# Altium PCB controller_V1.1.PcbDoc
Units mm, origin at the board's own origin, x right, y up, seen from the top; angles counter-clockwise.
Board outline 150.51 x 150.51 mm, 4 copper layers (Top Layer, GND, VCC, Bottom Layer); 133 components, 126 nets, 409 pads, 1 vias.
Unrouted connection lines stored in the file: 232.
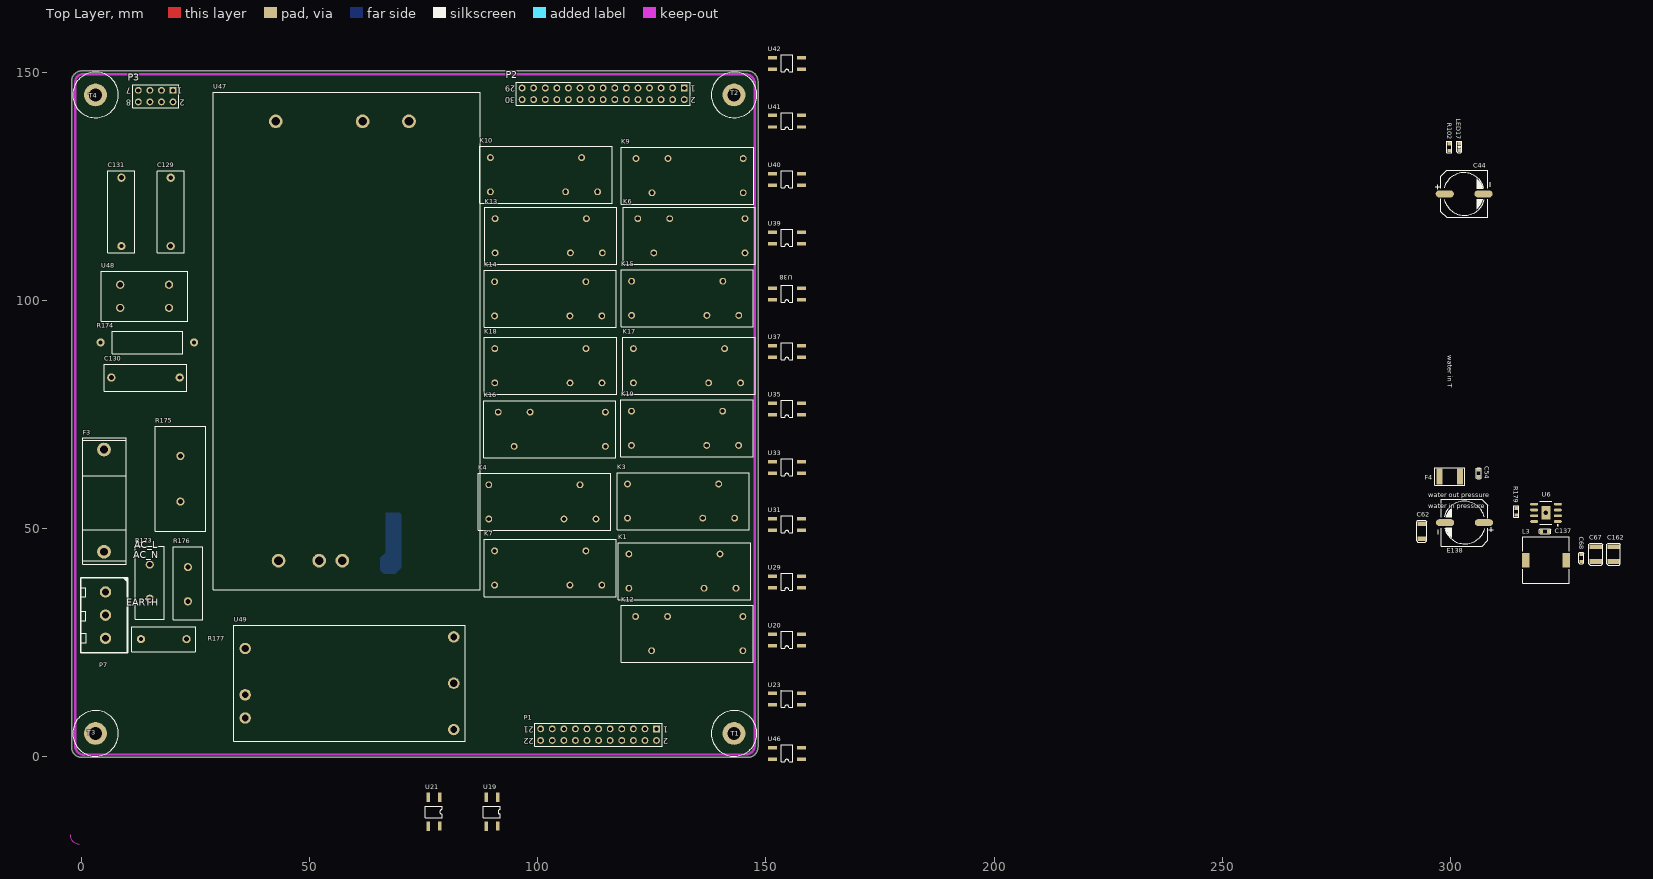
[diagram p0: Top Layer view]
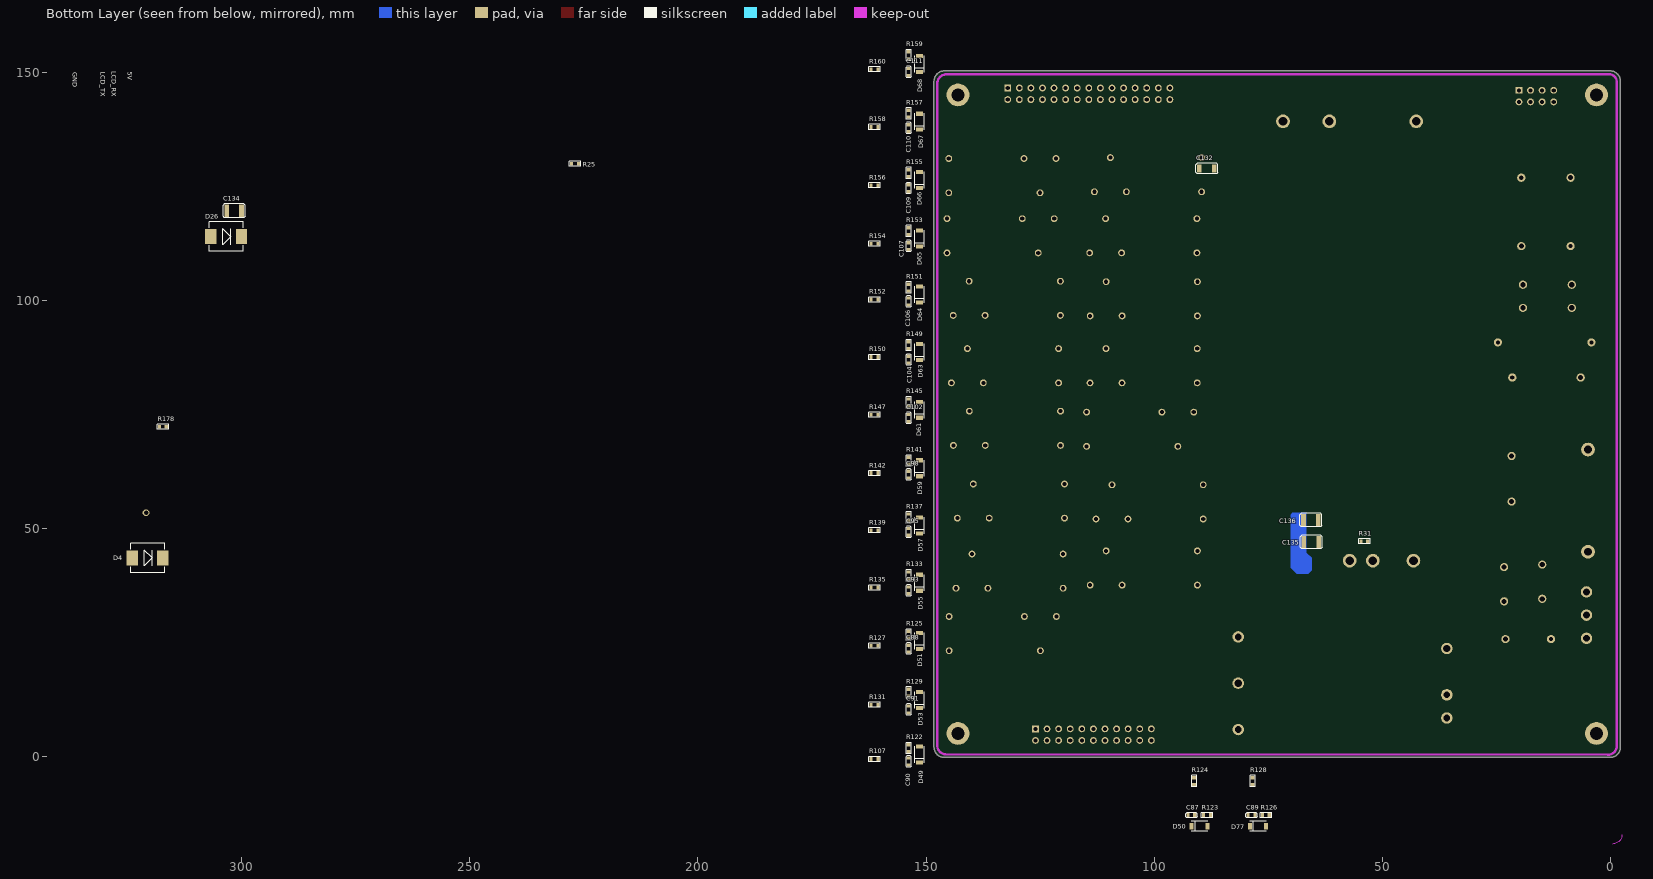
[diagram p1: Bottom Layer view, seen from below]

## Layer stack, top to bottom
Top Solder: solder mask 0.0102, Solder Resist, Dk 3.5
Top Layer: signal copper 0.0356
Dielectric1: core 0.32, FR-4, Dk 4.8
GND: signal copper 0.0356
Dielectric2: prepreg 0.32, FR-4, Dk 4.8
VCC: signal copper 0.0356
Dielectric3: core 0.32, FR-4, Dk 4.8
Bottom Layer: signal copper 0.0356
Bottom Solder: solder mask 0.0102, Solder Resist, Dk 3.5

## Board outline
0,-0.254 cw(c0,2) -2.254,2 -2.254,147.997 -2.254,148 cw(c0,148) 0,150.254 146,150.254 cw(c146,148) 148.254,148 148.254,2 cw(c146,2) 146,-0.254

## Design rules (kind name [scope] priority, off if disabled: settings)
Clearance [InPolygon] p1: gap=0.381 ignorepadtopadclearanceinfootprint=FALSE except(0: Arc-Hole Track-Hole SMDPad-Hole THPad-Hole Via-Hole Fill-Hole Poly-Hole Region-Hole Text-Hole)
Clearance Clearance_1 [All] p2: gap=0.127 ignorepadtopadclearanceinfootprint=FALSE except(0: Arc-Hole Track-Hole SMDPad-Hole THPad-Hole Via-Hole Fill-Hole Poly-Hole Region-Hole Text-Hole)
HoleToHoleClearance [All] p1: gap=0.127 allowstackedmicrovias=TRUE
MinimumSolderMaskSliver [All] p1: minsoldermaskwidth=0.127
PolygonConnect PolygonConnect_1 [IsVia] p1: connectstyle=Direct reliefconductorwidth=0.254 reliefentries=4 polygonreliefangle="90 Angle" airgapwidth=0.254
PolygonConnect [All] p2: connectstyle=Relief reliefconductorwidth=0.508 reliefentries=4 polygonreliefangle="90 Angle" airgapwidth=0.254
RoutingVias [All] p1: holewidth=0.254 width=0.508 viastyle="Through Hole" minholewidth=0.254 minwidth=0.508 maxholewidth=2.54 maxwidth=5.08
SilkToSilkClearance [All] p1: silktosilkclearance=0.127
SilkToSolderMaskClearance SilkscreenOverComponentPads [IsPad] p1: minsilkscreentomaskgap=0 clearancetoexposedcopper=TRUE
SolderMaskExpansion [All] p1: expansion=0.102 istentingtop=FALSE
Width [All] p1: maxlimit=5.08 minlimit=0.254 preferedwidth=0.254
26 further rules are at their usual default settings.

## Classes and differential pairs
net class N000-1_[0..19]: N000-1_0 N000-1_1 N000-1_2 N000-1_3 N000-1_4 N000-1_5 N000-1_6 N000-1_7 N000-1_8 N000-1_9 N000-1_10 N000-1_11 N000-1_12 N000-1_13 N000-1_14 N000-1_15 N000-1_16 N000-1_17 N000-1_18 N000-1_19
net class DO_O[0..19]: DO_O0 DO_O1 DO_O2 DO_O3 DO_O4 DO_O5 DO_O6 DO_O7 DO_O8 DO_O9 DO_O10 DO_O11 DO_O12 DO_O13 DO_O14 DO_O15 DO_O16 DO_O17 DO_O18 DO_O19
net class DO[0..19]: DO0 DO1 DO2 DO3 DO4 DO5 DO6 DO7 DO8 DO9 DO10 DO11 DO12 DO13 DO14 DO15 DO16 DO17 DO18 DO19
net class DI[0..11]: DI0 DI1 DI2 DI3 DI4 DI5 DI6 DI7 DI8 DI9 DI10 DI11
component class relay: K1 K3 K4 K6 K7 K9 K10 K12 K13 K14 K15 K16 K17 K18 K19 P2
component class power: C44 C54 C62 C67 C68 C129 C130 C131 C132 C134 C135 C136 C137 C162 D4 D26 E138 F3 F4 L3 LED17 P7 R25 R31 R102 R173 R174 R175 R176 R177 R178 R179 T1 T2 T3 T4 U6 U47 U48 U49
component class do: C87 C88 C89 C90 C91 C93 C95 C98 C102 C104 C106 C107 C109 C110 C111 D49 D50 D51 D53 D55 D57 D59 D61 D63 D64 D65 D66 D67 D68 D77 F1 P1 P3 R107 R122 R123 R124 R125 R126 R127 R128 R129 R131 R133 R135 R137 R139 R141 R142 R145 R147 R149 R150 R151 R152 R153 R154 R155 R156 R157 R158 R159 R160 U19 U20 U21 U23 U29 U31 U33 U35 U37 U38 U39 U40 U41 U42 U46

## Components (designator, comment, footprint, x,y, rotation, side; value= is the part's Value field where it differs from the comment)
C44 "220uF/50V" Φ10×10 303.077,123.292 r90 top
C54 "1uF" 0603C 306.252,62.789 r270 top
C62 "1nF/2kV" 1206C 293.755,50.952 r270 top
C67 "22uF/10V" 1210C 331.931,42.697 r90 top
C68 "0.1uF" 0603C 328.756,42.697 r90 top
C87 "0.1uF" 0603C 92.563,-12.929 r180 bottom
C88 "0.1uF" 0603C 153.829,22.838 r90 bottom
C89 "0.1uF" 0603C 79.403,-12.929 r180 bottom
C90 "0.1uF" 0603C 153.829,-1.918 r90 bottom
C91 "0.1uF" 0603C 153.829,9.504 r90 bottom
C93 "0.1uF" 0603C 153.829,35.612 r90 bottom
C95 "0.1uF" 0603C 153.829,48.441 r90 bottom
C98 "0.1uF" 0603C 153.829,60.984 r90 bottom
C102 "0.1uF" 0603C 153.829,73.41 r90 bottom
C104 "0.1uF" 0603C 153.829,86.186 r90 bottom
C106 "0.1uF" 0603C 153.829,98.937 r90 bottom
C107 "0.1uF" 0603C 153.829,111.078 r90 bottom
C109 "0.1uF" 0603C 153.829,123.778 r90 bottom
C110 "0.1uF" 0603C 153.829,136.96 r90 bottom
C111 "0.1uF" 0603C 153.829,149.254 r90 bottom
C129 "2.2nF/400VAC" 15x18 19.488,126.836 r270 top value=22nF
C130 "0.15μF/300VAC" 15x18 21.458,83.033 r180 top value=22nF
C131 "2.2nF/400VAC" 15x18 8.668,111.836 r90 top value=22nF
C132 "1nF/2KV" 1206C 90.05,128.854 r180 bottom value=22nF
C134 "1uF/50V" 1210C 303.331,119.609 r180 bottom value=22nF
C135 "4.7uF/50V" 1210C 63.91,46.965 r0 bottom value=22nF
C136 "10uF/50V" 1210C 63.988,51.791 r0 bottom value=22nF
C137 "0.01uF" 0603C 320.044,49.276 r0 top
C162 "22uF/10V" 1210C 335.843,42.697 r90 top
D4 "SS54" SMC 324.057,43.459 r180 bottom
D26 "SMCJ30CA" SMC 306.832,113.919 r180 bottom
D49 "LL4148" DO-213AB/LL34/MiniMELF 151.416,0.368 r90 bottom
D50 "LL4148" DO-213AB/LL34/MiniMELF 90.023,-15.342 r180 bottom
D51 "LL4148" DO-213AB/LL34/MiniMELF 151.416,25.251 r90 bottom
D53 "LL4148" DO-213AB/LL34/MiniMELF 151.416,12.298 r90 bottom
D55 "LL4148" DO-213AB/LL34/MiniMELF 151.416,38.025 r90 bottom
D57 "LL4148" DO-213AB/LL34/MiniMELF 151.416,50.6 r90 bottom
D59 "LL4148" DO-213AB/LL34/MiniMELF 151.416,63.143 r90 bottom
D61 "LL4148" DO-213AB/LL34/MiniMELF 151.416,75.95 r90 bottom
D63 "LL4148" DO-213AB/LL34/MiniMELF 151.416,88.599 r90 bottom
D64 "LL4148" DO-213AB/LL34/MiniMELF 151.416,101.223 r90 bottom
D65 "LL4148" DO-213AB/LL34/MiniMELF 151.416,113.491 r90 bottom
D66 "LL4148" DO-213AB/LL34/MiniMELF 151.416,126.318 r90 bottom
D67 "LL4148" DO-213AB/LL34/MiniMELF 151.416,139.119 r90 bottom
D68 "LL4148" DO-213AB/LL34/MiniMELF 151.416,151.794 r90 bottom
D77 "LL4148" DO-213AB/LL34/MiniMELF 77.244,-15.342 r180 bottom
E138 "100uF/50V" Φ10×10 303.153,51.206 r270 top value=100pF
F3 "6.3A/250V" 可视开关电源保险丝座 4.858,44.831 r90 top
F4 "2A" 1812-F 297.667,61.316 r0 top
K1 "G2RL-1-H" G2RL-1-H 119.93,44.33 r0 top
K3 "G2RL-1-H" G2RL-1-H 119.641,59.697 r0 top
K4 "G2RL-1-H" G2RL-1-H 89.227,59.512 r0 top
K6 "G2RL-1-H" G2RL-1-H 145.396,110.356 r180 top
K7 "G2RL-1-H" G2RL-1-H 90.507,45.016 r0 top
K9 "G2RL-1-H" G2RL-1-H 145.005,123.539 r180 top
K10 "G2RL-1-H" G2RL-1-H 89.577,131.249 r0 top
K12 "G2RL-1-H" G2RL-1-H 144.929,23.132 r180 top
K13 "G2RL-1-H" G2RL-1-H 90.618,117.863 r0 top
K14 "G2RL-1-H" G2RL-1-H 90.507,104.038 r0 top
K15 "G2RL-1-H" G2RL-1-H 120.54,104.147 r0 top
K16 "G2RL-1-H" G2RL-1-H 114.789,67.938 r180 top
K17 "G2RL-1-H" G2RL-1-H 120.936,89.364 r0 top
K18 "G2RL-1-H" G2RL-1-H 90.542,89.364 r0 top
K19 "G2RL-1-H" G2RL-1-H 120.504,75.648 r0 top
L3 "CDRH105NP-100NC" CDRH105 315.929,37.871 r90 top
LED17 "5V" 0603LED 302.016,134.281 r270 top
P1 "Header 11X2" HDR2X11 126,6 r180 top locked
P2 "Header 15X2" HDR2X15 132.087,146.507 r180 top
P3 "Header 4X2" HDR2X4 20,146 r180 top locked
P7 "Header 3" KF128V-3P 5.188,36.017 r270 top
R25 "NC" 0603R 226.219,129.896 r0 bottom value=100K
R31 "NC" 0603r 53.141,47.092 r0 bottom value=100K
R102 "5.1K" 0603R 299.857,134.281 r270 top
R107 "510" 0603R 160.535,-0.648 r0 bottom
R122 "51K" 0603R 153.829,1.003 r90 bottom
R123 "51K" 0603R 89.134,-12.929 r180 bottom
R124 "510" 0603R 91.212,-6.223 r90 bottom
R125 "51K" 0603R 153.829,25.886 r90 bottom
R126 "51K" 0603R 76.228,-12.929 r180 bottom
R127 "510" 0603R 160.535,24.222 r0 bottom
R128 "510" 0603R 78.416,-6.223 r90 bottom
R129 "51K" 0603R 153.829,13.187 r90 bottom
R131 "510" 0603R 160.535,11.255 r0 bottom
R133 "51K" 0603R 153.829,38.914 r90 bottom
R135 "510" 0603R 160.535,36.969 r0 bottom
R137 "51K" 0603R 153.829,51.616 r90 bottom
R139 "510" 0603R 160.535,49.531 r0 bottom
R141 "51K" 0603R 153.829,64.032 r90 bottom
R142 "510" 0603R 160.535,62.06 r0 bottom
R145 "51K" 0603R 153.829,76.839 r90 bottom
R147 "510" 0603R 160.535,74.853 r0 bottom
R149 "51K" 0603R 153.829,89.361 r90 bottom
R150 "510" 0603R 160.535,87.489 r0 bottom
R151 "51K" 0603R 153.829,101.985 r90 bottom
R152 "510" 0603R 160.535,100.1 r0 bottom
R153 "51K" 0603R 153.829,114.38 r90 bottom
R154 "510" 0603R 160.535,112.355 r0 bottom
R155 "51K" 0603R 153.829,127.08 r90 bottom
R156 "510" 0603R 160.535,125.168 r0 bottom
R157 "51K" 0603R 153.829,140.135 r90 bottom
R158 "510" 0603R 160.535,137.956 r0 bottom
R159 "51K" 0603R 153.829,152.937 r90 bottom
R160 "510" 0603R 160.535,150.618 r0 bottom
R173 "14D561K" 14D561K 14.891,34.519 r90 top
R174 "1MΩ/2W" 5x15.5 4.121,90.729 r0 top value=100K
R175 "20D471K" 20D471K 21.615,55.829 r90 top
R176 "14D561K" 14D561K 23.248,41.46 r270 top
R177 "B5G3600" B5G3600 12.961,25.679 r0 top
R178 "NC" 0603r 318.063,72.238 r180 bottom value=100K
R179 "100K" 0603R 314.532,54.381 r270 top
T1 "TP" M2.5 143,5 r0 top
T2 "TP" M2.5 143,145 r0 top
T3 "TP" M2.5 3,5 r0 top
T4 "TP" M2.5 3,145 r0 top
U6 "LM22676MRE-5.0/NOPB" SOP127P600X168_HS-8N 321.009,53.365 r180 top
U19 "AQY210S" sop4 91.212,-8.992 r270 top
U20 "AQY210S" sop4 157.766,24.222 r180 top
U21 "AQY210S" sop4 78.448,-8.992 r270 top
U23 "AQY210S" sop4 157.766,11.255 r180 top
U29 "AQY210S" sop4 157.766,36.969 r180 top
U31 "AQY210S" sop4 157.766,49.531 r180 top
U33 "AQY210S" sop4 157.766,62.06 r180 top
U35 "AQY210S" sop4 157.766,74.853 r180 top
U37 "AQY210S" sop4 157.766,87.489 r180 top
U38 "AQY210S" sop4 157.766,100.1 r180 top
U39 "AQY210S" sop4 157.766,112.355 r180 top
U40 "AQY210S" sop4 157.766,125.168 r180 top
U41 "AQY210S" sop4 157.766,137.956 r180 top
U42 "AQY210S" sop4 157.766,150.618 r180 top
U46 "AQY210S" sop4 157.766,-0.648 r180 top
U47 "LHE60-20B24" LHE60-20B24 71.726,139.195 r270 top
U48 "FL2D-30-222" TY-100P 19.114,98.298 r180 top
U49 "URB24_LD-50WR3G" URB24_LD-50WR3G 33.281,16.002 r0 top

## Footprints (in the part's own frame and the unit in brackets; to place one, negate y for a bottom-side part, rotate by r counter-clockwise, add the part's x,y. Pads: shape width x height; smd on the part's side, far side on the other; paste and mask are expansions set on the pad)
5x15.5 [mm]
  round 1.8 hole 0.9: 1(0,0) 2(20.5,0)
  silkscreen extent 2.5,-2.5 18,2.5
14D561K [mm]
  round 1.8 hole 1.1: 1(0,0) 2(7.5,0)
  silkscreen extent -4.5,-3.21 11.5,3.21
15x18 [mm]
  round 1.8 hole 0.9: 1(0,0)
  round 1.8 hole 1.1: 2(15,0)
  silkscreen extent -1.5,-2.92 16.5,3
20D471K [mm]
  round 1.8 hole 1.1: 1(0,0) 2(10,0)
  silkscreen extent -6.5,-5.5 16.5,5.5
0603C [mm]
  rect 0.7x0.85 smd: 1(0,0) 2(1.5,0)
  silkscreen extent -0.5,-0.55 2,0.55
0603LED [mm]
  rect 0.7x0.85 smd: 1(0,0) 2(1.5,0)
  silkscreen extent -0.5,-0.55 2,0.55
0603R [mm]
  rect 0.7x0.85 smd: 1(0,0) 2(1.5,0)
  silkscreen extent -0.5,-0.55 2,0.55
0603r [mm]
  rect 0.7x0.85 smd: 1(0,0) 2(1.5,0)
  silkscreen extent -0.5,-0.55 2,0.55
1206C [mm]
  rect 1x1.8 smd: 1(0,0) 2(3.25,0)
  silkscreen extent -0.8,-1.1 4.05,1.1
1210C [mm]
  rect 1x2.7 smd: 1(0,0) 2(3.25,0)
  silkscreen extent -0.8,-1.5 4.05,1.5
1812-F [mm]
  rect 1.3x3.5 smd: 1(0,0) 2(4.5,0)
  silkscreen extent -1,-1.95 5.5,1.95
B5G3600 [mm]
  round 1.8 hole 0.9: 1(0,0)
  round 1.8 hole 1.1: 2(10,0)
  silkscreen extent -2,-2.75 12,2.75
CDRH105 [mm]
  rect 3.2x1.6 smd: 1(5.1,-0.65) 2(5.1,-9.55)
  silkscreen extent 0,-10.2 10.2,0
DO-213AB/LL34/MiniMELF [mm]
  rect 0.9x1.5 smd: 1(1.75,0) 2(-1.75,0)
  silkscreen extent -1.8,-1.08 1.8,1.08
G2RL-1-H [mm]
  round 1.5 hole 0.9: 1(20,0) 2(16.5,-7.5) 3(23.5,-7.5) 4(0,-7.5) 5(0,0)
  silkscreen extent -2.3,-10 26.7,2.5
HDR2X4 [mm] "Connector; Header; 4x2 Position"
  rect 1.5x1.5 hole 0.9: 1(0,0)
  round 1.5 hole 0.9: 2(0,2.54) 3(2.54,0) 4(2.54,2.54) 5(5.08,0) 6(5.08,2.54) 7(7.62,0) 8(7.62,2.54)
  silkscreen extent -1.27,-1.27 8.89,3.81
HDR2X11 [mm] "Connector; Header; 11x2 Position"
  rect 1.5x1.5 hole 0.9: 1(0,0)
  round 1.5 hole 0.9: 2(0,2.54) 3(2.54,0) 4(2.54,2.54) 5(5.08,0) 6(5.08,2.54) 7(7.62,0) 8(7.62,2.54) 9(10.16,0) 10(10.16,2.54) 11(12.7,0) 12(12.7,2.54) 13(15.24,0) 14(15.24,2.54) 15(17.78,0) 16(17.78,2.54) 17(20.32,0) 18(20.32,2.54) 19(22.86,0) 20(22.86,2.54) 21(25.4,0) 22(25.4,2.54)
  silkscreen extent -1.27,-1.27 26.67,3.81
HDR2X15 [mm] "Connector; Header; 15x2 Position"
  rect 1.5x1.5 hole 0.9: 1(0,0)
  round 1.5 hole 0.9: 2(0,2.54) 3(2.54,0) 4(2.54,2.54) 5(5.08,0) 6(5.08,2.54) 7(7.62,0) 8(7.62,2.54) 9(10.16,0) 10(10.16,2.54) 11(12.7,0) 12(12.7,2.54) 13(15.24,0) 14(15.24,2.54) 15(17.78,0) 16(17.78,2.54) 17(20.32,0) 18(20.32,2.54) 19(22.86,0) 20(22.86,2.54) 21(25.4,0) 22(25.4,2.54) 23(27.94,0) 24(27.94,2.54) 25(30.48,0) 26(30.48,2.54) 27(33.02,0) 28(33.02,2.54) 29(35.56,0) 30(35.56,2.54)
  silkscreen extent -1.27,-1.27 36.83,3.81
KF128V-3P [mm]
  round 2.5 hole 1.5: 1(0,0) 2(5.08,0) 3(10.16,0)
  silkscreen extent -3.1,-5.4 13.33,4.8
LHE60-20B24 [mm]
  round 3 hole 1.9: 1(0,0) 2(0,-10.16) 3(0,-29.21) 4(96.32,-28.59) 5(96.32,-19.69) 6(96.32,-14.61)
  silkscreen extent -6.34,-42.9 102.66,15.6
M2.5 [mm]
  round 5 hole 2.8 unplated: 1(0,0)
  silkscreen extent -5,-5 5,5
SMC [mm]
  rect 2.5x3.3 smd: 1(0,0) 2(6.75,0)
  silkscreen extent -0.35,-3.25 7.15,3.25
sop4 [mil]
  rect 80x30 smd: 1(0,0) 2(0,-100) 3(250,-100) 4(249,0)
  silkscreen extent 76,-125 176,21
SOP127P600X168_HS-8N [mm] "SOP, 8-Leads, Body 5.0x4.0mm (max), Pitch 1.27mm, IPC Medium Density"
  oval 1.75x0.6 smd: 1(-2.6,1.905) 2(-2.6,0.635) 3(-2.6,-0.635) 4(-2.6,-1.905) 5(2.6,-1.905) 6(2.6,-0.635) 7(2.6,0.635) 8(2.6,1.905)
  rect 1.9x3 smd: 9(0,0)
  silkscreen extent -2.73,-2.5 1.33,2.88, body extent -2,-2.5 2,2.5, height 1.68
TY-100P [mm]
  round 1.8 hole 1.2: 1(0,0) 2(10.7,0) 3(10.7,-5.08) 4(0,-5.08)
  silkscreen extent -4.15,-8.08 14.86,2.96
URB24_LD-50WR3G [mm]
  round 2.5 hole 1.6: 1(2.54,7.62) 5(48.26,0)
  round 2.5 hole 1.5: 2(2.54,-2.54) 3(2.54,-7.62) 4(48.26,-10.16) 6(48.26,10.16)
  silkscreen extent 0,-12.7 50.8,12.7
Φ10×10 [mm]
  oval 1.524x4 smd: 1(0,4.25) 2(0,-4.25)
  silkscreen extent -5.15,-5.71 5.15,6.35
可视开关电源保险丝座 [mm]
  round 3 hole 1.7: 1(0,0) 2(22.4,0)
  silkscreen extent -2.69,-4.86 24.98,4.64

## Part data
C44 E138: library part "Cap Pol1", "Polarized Capacitor (Radial)", LatestRevisionDate=17-Jul-2002, LatestRevisionNote="Re-released for DXP Platform.", PackageReference=RB7.6-15, Published=8-Jun-2000, Publisher="Altium Limited"
C54 C62 C67 C68 C87 C88 C89 C90 C91 C93 C95 C98 C102 C104 C106 C107 C109 C110 C111 C137 C162: library part CAP, "Capacitor"
C129 C130 C131 C132 C134 C135 C136: library part Cap, "Capacitor", LatestRevisionDate=17-Jul-2002, LatestRevisionNote="Re-released for DXP Platform.", PackageDescription="Radial Cap, Thru-Hole; 2 Leads; 0.3 in Pin Spacing", PackageReference=RAD-0.3, Published=8-Jun-2000, Publisher="Altium Limited"
D4 D26: library part "DIODE S", "Schottky Diode"
D49 D50 D51 D53 D55 D57 D59 D61 D63 D64 D65 D66 D67 D68 D77: "VISHAY,LL4148,圆柱体MiniMELF100V/2A,ROHS", 制造商=VISHAY, 名称=快速开关二极管, 版本=V1.00, 物料编号=APLLY
F3 F4: library part "Fuse 1", "Fuse", LatestRevisionDate=17-Jul-2002, LatestRevisionNote="Re-released for DXP Platform.", PackageDescription="Thru-Hole; 2 Leads", PackageReference=PIN-W2/E2.8, Published=8-Jun-2000, Publisher="Altium Limited"
K1 K3 K4 K6 K7 K9 K10 K12 K13 K14 K15 K16 K17 K18 K19: library part Relay-SPDT, "Single-Pole Dual-Throw Relay", LatestRevisionDate=17-Jul-2002, LatestRevisionNote="Re-released for DXP Platform.", PackageReference=MODULE5B, Published=24-Mar-1999, Publisher="Altium Limited"
L3: library part INDUCTOR
LED17: library part LED
P1: "Header, 11-Pin, Dual row", LatestRevisionDate=17-Jul-2002, LatestRevisionNote="Re-released for DXP Platform.", Publisher="Altium Limited"
P2: "Header, 15-Pin, Dual row", LatestRevisionDate=17-Jul-2002, LatestRevisionNote="Re-released for DXP Platform.", Publisher="Altium Limited"
P3: "Header, 4-Pin, Dual row", LatestRevisionDate=17-Jul-2002, LatestRevisionNote="Re-released for DXP Platform.", Publisher="Altium Limited"
P7: "Header, 3-Pin", LatestRevisionDate=17-Jul-2002, LatestRevisionNote="Re-released for DXP Platform.", Publisher="Altium Limited"
R25 R31 R174 R178: library part RES0603, ID=233, 制造商=三星/YAGEO, 参数值=1.00E+04, 器件等级=——, 工作温度="–55°C to 155°C", 序号=109, 物料主编码(PN)=150000040, 物料名称=贴片电阻, 物料描述=RES,贴片电阻,0603,10k,±1%,1/10W,1.6X0.8X0.45mm,RC1608F103CS/RC0603FR-0710KL, 物料类型=表贴电阻, 精度=±1%, 规格型号(完整型号)=RC1608F103CS/RC0603FR-0710KL
R102: library part R, "R"
R107 R124 R127 R128 R131 R135 R139 R142 R147 R150 R152 R154 R156 R158 R160: library part RES2
R122 R123 R125 R126 R129 R133 R137 R141 R145 R149 R151 R153 R155 R157 R159: library part Res0805M
R173 R175 R176 R177: library part "Res Varistor", "Varistor (Voltage-Sensitive Resistor)", Code_IPC=RESC2012, LatestRevisionDate=29-May-2009, LatestRevisionNote="IPC-7351 Footprint Added.", PackageDescription="Chip Resistor 0805 Case Size", PackageReference=6-0805, PackageVersion=Mar-2003, Published=24-Mar-1999, Publisher="Altium Limited"
R179: library part Res1, "Resistor", LatestRevisionDate=17-Jul-2002, LatestRevisionNote="Re-released for DXP Platform.", PackageReference=AXIAL-0.3, Published=8-Jun-2000, Publisher="Altium Limited"
U6: library part LM22676MR-5.0
U19 U20 U21 U23 U29 U31 U33 U35 U37 U38 U39 U40 U41 U42 U46: library part Optoisolator1, "4-Pin Phototransistor Optocoupler", DatasheetVersion=Nov-2003, LatestRevisionDate=04-Mar-2005, LatestRevisionNote="Sch pins 3 & 4 Swapped.", PackageReference=DIP-4, Published=24-Mar-1999, Publisher="Altium Limited"
U48: library part TY-100P, "PCB mounting filters"

## Via types
v1: diameter 1.5, hole 1, Top Layer to Bottom Layer, 1 vias

## Nets (pads, with @x,y where several pads share a name; then routed paths per layer and width w, separated by ;. In a path a pad name is that pad's centre, name@x,y a point inside that pad or via, vN(x,y) a via of type N, cw(c..) or ccw(c..) an arc to the next point about the centre after c; other vN are vias at no path point)
3.3V_ISO: R107.2 R124.2 R127.2 R128.2 R131.2 R135.2 R139.2 R142.2 R147.2 R150.2 R152.2 R154.2 R156.2 R158.2 R160.2
24V_F: C54.2 D49.1 D50.1 D51.1 D53.1 D55.1 D57.1 D59.1 D61.1 D63.1 D64.1 D65.1 D66.1 D67.1 D68.1 D77.1 E138.1 F4.2 K1.4 K3.4 K4.4 K6.4 K7.4 K9.4 K10.4 K12.4 K13.4 K14.4 K15.4 K16.4 K17.4 K18.4 K19.4 P1.14 R122.2 R123.2 R125.2 R126.2 R129.2 R133.2 R137.2 R141.2 R145.2 R149.2 R151.2 R153.2 R155.2 R157.2 R159.2 R179.2 U6.7
24V_IN: C44.1 C134.2 C135.2 C136.2 D26.2 P1.18 R25.1 R31.2 R102.2 U47.6 U49.3
AC_L: C131.1 U47.2 U48.3
AC_N: C129.2 U47.1 U48.4
DO_0: C90.1 D49.2 K1.5 U46.4
DO_1: C88.1 D51.2 K4.5 U20.4
DO_2: C91.1 D53.2 K7.5 U23.4
DO_3: C93.1 D55.2 K10.5 U29.4
DO_4: C95.1 D57.2 K13.5 U31.4
DO_5: C98.1 D59.2 K15.5 U33.4
DO_6: C102.1 D61.2 K17.5 U35.4
DO_7: C104.1 D63.2 K19.5 U37.4
DO_8: C106.1 D64.2 K3.5 U38.4
DO_9: C107.1 D65.2 K6.5 U39.4
DO_10: C109.1 D66.2 K9.5 U40.4
DO_11: C110.1 D67.2 K12.5 U41.4
DO_12: C111.1 D68.2 K14.5 U42.4
DO_13: C87.1 D50.2 K16.5 U19.4
DO_14: C89.1 D77.2 K18.5 U21.4
DO_CTRL_0: P1.1 U46.2
DO_CTRL_1: P1.3 U23.2
DO_CTRL_2: P1.5 U20.2
DO_CTRL_3: P1.7 U29.2
DO_CTRL_4: P1.9 U31.2
DO_CTRL_5: P1.11 U33.2
DO_CTRL_6: P1.13 U35.2
DO_CTRL_7: P1.15 U37.2
DO_CTRL_8: P1.17 U38.2
DO_CTRL_9: P1.19 U39.2
DO_CTRL_10: P1.21 U40.2
DO_CTRL_11: P1.2 U41.2
DO_CTRL_12: P1.4 U42.2
DO_CTRL_13: P1.6 U19.2
DO_CTRL_14: P1.8 U21.2
FGND: C54.1 C62.1 C67.2 C68.2 C162.2 D4.1 E138.2 P1.10 P1.12 P3.1 P3.3 P3.5 P3.7 U6.6 U6.9 U19.3 U20.3 U21.3 U23.3 U29.3 U31.3 U33.3 U35.3 U37.3 U38.3 U39.3 U40.3 U41.3 U42.3 U46.3 U49.5
  other v1: 321.009,53.365
GND: C44.2 C132.1 C134.1 C135.1 C136.1 D26.1 LED17.2 P1.16 P1.22 P3.2 P3.4 P3.6 P3.8 U47.5 U49.2
NetC62_2: C62.2 C129.1 C131.2 C132.2 P7.3 R177.1 U47.3
NetC87_2: C87.2 R123.1
NetC88_2: C88.2 R125.1
NetC89_2: C89.2 R126.1
NetC90_2: C90.2 R122.1
NetC91_2: C91.2 R129.1
NetC93_2: C93.2 R133.1
NetC95_2: C95.2 R137.1
NetC98_2: C98.2 R141.1
NetC102_2: C102.2 R145.1
NetC104_2: C104.2 R149.1
NetC106_2: C106.2 R151.1
NetC107_2: C107.2 R153.1
NetC109_2: C109.2 R155.1
NetC110_2: C110.2 R157.1
NetC111_2: C111.2 R159.1
NetC130_1: C130.1 P7.2 R174.2 R175.1 R176.1 U48.1
NetC130_2: C130.2 F3.2 R173.2 R174.1 R175.2 U48.2
NetC137_1: C137.1 D4.2 L3.1 U6.8
NetC137_2: C137.2 U6.1
NetF3_1: F3.1 P7.1
NetF4_1: F4.1 R178.2 U49.4
NetLED17_1: LED17.1 R102.1
NetR25_2: R25.2 U49.1
NetR31_1: R31.1 U47.4
NetR107_1: R107.1 U46.1
NetR124_1: R124.1 U19.1
NetR127_1: R127.1 U20.1
NetR128_1: R128.1 U21.1
NetR131_1: R131.1 U23.1
NetR135_1: R135.1 U29.1
NetR139_1: R139.1 U31.1
NetR142_1: R142.1 U33.1
NetR147_1: R147.1 U35.1
NetR150_1: R150.1 U37.1
NetR152_1: R152.1 U38.1
NetR154_1: R154.1 U39.1
NetR156_1: R156.1 U40.1
NetR158_1: R158.1 U41.1
NetR160_1: R160.1 U42.1
NetR173_1: R173.1 R176.2 R177.2
NetR178_1: R178.1 U49.6
NetR179_1: R179.1 U6.5
RELAY_A1: K1.1 P2.1
RELAY_A2: K4.1 P2.5
RELAY_A3: K7.1 P2.3
RELAY_A4: K10.1 P2.7
RELAY_A5: K13.1 P2.9
RELAY_A6: K15.1 P2.11
RELAY_A7: K17.1 P2.13
RELAY_A8: K19.1 P2.15
RELAY_A9: K3.1 P2.17
RELAY_A10: K6.1 P2.19
RELAY_A11: K9.1 P2.21
RELAY_A12: K12.1 P2.23
RELAY_A13: K14.1 P2.25
RELAY_A14: K16.1 P2.27
RELAY_A15: K18.1 P2.29
RELAY_B1: K1.3 P2.2
RELAY_B2: K4.3 P2.6
RELAY_B3: K7.3 P2.4
RELAY_B4: K10.3 P2.8
RELAY_B5: K13.3 P2.10
RELAY_B6: K15.3 P2.12
RELAY_B7: K17.3 P2.14
RELAY_B8: K19.3 P2.16
RELAY_B9: K3.3 P2.18
RELAY_B10: K6.3 P2.20
RELAY_B11: K9.3 P2.22
RELAY_B12: K12.3 P2.24
RELAY_B13: K14.3 P2.26
RELAY_B14: K16.3 P2.28
RELAY_B15: K18.3 P2.30
RELAY_C1: K1.2
RELAY_C2: K4.2
RELAY_C3: K7.2
RELAY_C4: K10.2
RELAY_C5: K13.2
RELAY_C6: K15.2
RELAY_C7: K17.2
RELAY_C8: K19.2
RELAY_C9: K3.2
RELAY_C10: K6.2
RELAY_C11: K9.2
RELAY_C12: K12.2
RELAY_C13: K14.2
RELAY_C14: K16.2
RELAY_C15: K18.2
VCC_5V_ISO: C67.1 C68.1 C162.1 L3.2 P1.20 U6.4
pads on no net: T1.1 T2.1 T3.1 T4.1 U6.2 U6.3

## Keep-outs
Keep-Out Layer:
  lines w0.127: -2.552,-17.247 ccw(c-0.552,-17.247) -0.552,-19.247 ; 470.929,-18.916 ccw(c470.929,-16.916) 472.929,-16.916 ; 470.948,155.778 cw(c470.948,153.778) 472.948,153.778
  lines w0.508: -1.492,2.33 ccw(c0.508,2.33) 0.508,0.33 ; -1.467,1.924 -1.455,147.834 cw(c0.229,147.834) 0.229,149.517 145.517,149.517 ; 0.203,0.33 145.549,0.388 ccw(c145.549,2.388) 147.549,2.388 ; 145.517,149.504 cw(c145.517,147.504) 147.517,147.504 ; 147.517,147.848 147.549,2.159

## Other copper
Bottom Layer:
  region net 24V_IN: 66.603,53.365 66.603,44.602 65.46,43.459 65.46,40.792 66.222,40.03 68.762,40.03 70.032,41.3 70.032,52.984 69.651,53.365

## Silkscreen, mask and mechanical layers (free items; w line width, h text height)
Top Overlay:
  text "485_B" at 413.9,154.864 h1.02 r270
  text "485_A" at 425.076,154.534 h1.02 r270
  text "24V" at 474.098,143.205 h1.02
  text "24V" at 480.956,143.053 h1.02
  text "DI4" at 473.945,140.919 h1.02
  text "G" at 480.956,140.767 h1.02
  text "DI5" at 474.047,138.455 h1.02
  text "G" at 480.956,138.328 h1.02
  text "DI6" at 473.971,135.738 h1.02
  text "G" at 480.956,135.738 h1.02
  text "DI" at 485.985,133.248 h1.02
  text "DI7" at 474.352,133.223 h1.02
  text "G" at 480.956,133.071 h1.02
  text "DI0" at 474.479,130.861 h1.02
  text "G" at 480.956,130.607 h1.02
  text "DI1" at 474.377,128.245 h1.02
  text "G" at 480.956,128.118 h1.02
  text "DI2" at 474.377,125.857 h1.02
  text "G" at 480.956,125.603 h1.02
  text "DI3" at 474.352,123.622 h1.02
  text "G" at 480.956,123.444 h1.02
  text "G" at 474.809,120.269 h1.02
  text "G" at 480.854,120.244 h1.02
  text "PB8" at 474.961,117.602 h1.02
  text "PB1" at 480.956,117.526 h1.02
  text "PB1" at 480.956,114.833 h1.02
  text "PB8" at 474.961,114.783 h1.02
  text "G" at 474.91,112.573 h1.02
  text "G" at 481.26,112.497 h1.02
  text "PB9" at 474.961,110.287 h1.02
  text "PB2" at 480.956,110.236 h1.02
  text "PB2" at 480.956,107.798 h1.02
  text "PB9" at 474.961,107.721 h1.02
  text "G" at 480.778,105.512 h1.02
  text "G" at 474.885,105.41 h1.02
  text "PB10" at 480.956,102.768 h1.02
  text "PB3" at 474.961,102.591 h1.02
  text "PB10" at 480.93,100.228 h1.02
  text "PB3" at 474.961,99.695 h1.02
  text "G" at 480.625,97.841 h1.02
  text "G" at 474.987,97.714 h1.02
  text "PB4" at 480.956,95.021 h1.02
  text "PB11" at 474.961,94.894 h1.02
  text "SWDIO" at 370.567,92.329 h1.02 r270
  text "SWCLK" at 365.208,92.304 h1.02 r270
  text "PB11" at 474.961,92.075 h1.02
  text "PB4" at 480.956,91.948 h1.02
  text "3.3V" at 373.361,91.389 h1.02 r270
  text "GND" at 367.824,90.399 h1.02 r270
  text "G" at 474.91,89.662 h1.02
  text "G" at 480.829,89.662 h1.02
  text "water out T" at 488.906,88.29 h1.02 r270
  text "water in T" at 299.447,87.884 h1.02 r270
  text "PB5" at 480.956,87.351 h1.02
  text "PB12" at 474.961,87.173 h1.02
  text "PB12" at 474.961,84.633 h1.02
  text "PB5" at 480.956,84.506 h1.02
  text "G" at 481.108,81.915 h1.02
  text "G" at 474.885,81.89 h1.02
  text "PB13" at 474.961,78.969 h1.02
  text "PB6" at 480.956,78.867 h1.02
  text "PB13" at 474.961,76.581 h1.02
  text "PB6" at 480.956,76.352 h1.02
  text "AI0" at 474.961,72.873 h1.02
  text "24V" at 480.956,72.593 h1.02
  text "AI1" at 474.961,70.333 h1.02
  text "24V" at 480.956,70.079 h1.02
  text "AI2" at 474.961,67.742 h1.02
  text "24V" at 480.956,67.539 h1.02
  text "24V" at 480.956,65.024 h1.02
  text "AI3" at 474.961,64.999 h1.02
  text "AI4" at 474.961,62.713 h1.02
  text "24V" at 480.956,62.459 h1.02
  text "AI5" at 474.961,60.096 h1.02
  text "24V" at 480.956,59.995 h1.02
  text "AI6" at 474.961,57.607 h1.02
  text "24V" at 480.956,57.277 h1.02
  text "water out pressure" at 295.256,56.769 h1.02
  text "AI7" at 474.961,54.915 h1.02
  text "24V" at 480.956,54.864 h1.02
  text "water in pressure" at 295.155,54.407 h1.02
  text "AI8" at 474.961,52.426 h1.02
  text "24V" at 480.956,52.299 h1.02
  text "G" at 480.956,49.835 h1.02
  text "G" at 475.063,49.733 h1.02
  text "G" at 480.956,47.498 h1.02
  text "AO" at 474.961,47.346 h1.02
  text "AC_L" at 11.513,45.644 h1.52
  text "G" at 480.956,44.806 h1.02
  text "24V" at 474.961,44.704 h1.02
  text "AC_N" at 11.284,43.434 h1.52
  text "R20" at 474.834,40.31 h1.02
  text "R19" at 474.834,38.354 h1.02
  text "R18" at 474.834,35.814 h1.02
  text "R17" at 474.834,33.172 h1.02
  text "EARTH" at 9.684,32.969 h1.52
  text "R16" at 474.834,30.785 h1.02
  text "R15" at 474.834,28.219 h1.02
  text "R14" at 474.834,25.679 h1.02
  text "R13" at 474.834,23.19 h1.02
  text "R12" at 474.834,20.676 h1.02
  text "R11" at 474.834,18.11 h1.02
  text "R10" at 474.834,15.469 h1.02
  text "R9" at 474.834,12.929 h1.02
  text "R8" at 474.834,10.465 h1.02
  text "R7" at 474.834,7.95 h1.02
  text "R6" at 474.834,5.334 h1.02
  text "R5" at 474.834,2.819 h1.02
  text "R4" at 474.834,0.279 h1.02
  text "R3" at 474.834,-2.261 h1.02
  text "R2" at 474.834,-4.775 h1.02
  text "R1" at 474.834,-7.29 h1.02
Bottom Overlay:
  text "LCD_RX" at 328.478,150.165 h1.02 r90
  text "5V" at 325.05,150.089 h1.02 r90
  text "LCD_TX" at 330.943,150.063 h1.02 r90
  text "GND" at 337.039,149.987 h1.02 r90
  text "24V" at 472.723,143.891 h1.02
  text "24V" at 464.039,143.866 h1.02
  text "DI4" at 463.887,141.58 h1.02
  text "G" at 471.1,141.427 h1.02
  text "DI5" at 463.988,139.116 h1.02
  text "G" at 471.202,138.989 h1.02
  text "DI6" at 463.912,136.398 h1.02
  text "G" at 471.354,136.398 h1.02
  text "DI7" at 464.293,133.883 h1.02
  text "G" at 471.38,133.731 h1.02
  text "DI0" at 464.42,131.521 h1.02
  text "G" at 471.38,131.267 h1.02
  text "DI1" at 464.319,128.905 h1.02
  text "G" at 471.405,128.778 h1.02
  text "DI2" at 464.319,126.517 h1.02
  text "G" at 471.456,126.263 h1.02
  text "DI3" at 464.293,124.282 h1.02
  text "G" at 471.532,123.622 h1.02
  text "PB8" at 465.436,117.831 h1.02
  text "PB1" at 472.698,117.297 h1.02
  text "PB1" at 472.698,114.859 h1.02
  text "PB8" at 465.462,114.706 h1.02
  text "PB9" at 465.258,109.779 h1.02
  text "PB2" at 472.698,109.626 h1.02
  text "PB9" at 465.309,107.544 h1.02
  text "PB2" at 472.698,107.188 h1.02
  text "PB10" at 471.405,102.997 h1.02 r90
  text "PB3" at 465.411,101.905 h1.02
  text "PB3" at 465.487,99.568 h1.02
  text "PB11" at 465.309,94.539 h1.02
  text "PB4" at 472.698,94.412 h1.02
  text "PB4" at 472.698,91.821 h1.02
  text "PB11" at 465.385,91.516 h1.02
  text "PB12" at 465.411,87.046 h1.02
  text "PB5" at 472.698,86.817 h1.02
  text "PB5" at 472.698,84.328 h1.02
  text "PB12" at 465.512,83.795 h1.02
  text "PB13" at 465.284,79.223 h1.02
  text "PB6" at 472.698,79.121 h1.02
  text "PB13" at 465.284,76.835 h1.02
  text "PB6" at 472.698,76.606 h1.02
  text "AI0" at 464.877,73.127 h1.02
  text "24V" at 472.714,72.847 h1.02
  text "AI1" at 464.852,70.587 h1.02
  text "24V" at 472.714,70.333 h1.02
  text "AI2" at 464.903,67.996 h1.02
  text "24V" at 472.714,67.793 h1.02
  text "24V" at 472.714,65.278 h1.02
  text "AI3" at 464.903,65.253 h1.02
  text "AI4" at 464.801,62.967 h1.02
  text "24V" at 472.714,62.713 h1.02
  text "AI5" at 464.725,60.35 h1.02
  text "24V" at 472.714,60.249 h1.02
  text "AI6" at 464.75,57.861 h1.02
  text "24V" at 472.714,57.531 h1.02
  text "AI7" at 464.801,55.169 h1.02
  text "24V" at 472.714,55.118 h1.02
  text "AI8" at 465.462,52.68 h1.02
  text "24V" at 472.714,52.553 h1.02
  text "G" at 471.227,50.089 h1.02
  text "G" at 471.202,47.752 h1.02
  text "AO" at 465.284,47.6 h1.02
  text "G" at 471.405,45.06 h1.02
  text "24V" at 465.258,44.958 h1.02
  text "R20" at 465.411,40.284 h1.02
  text "R19" at 472.714,37.516 h1.02
  text "R18" at 472.714,34.976 h1.02
  text "R17" at 472.714,32.334 h1.02
  text "R16" at 472.472,29.947 h1.02
  text "R15" at 472.714,27.381 h1.02
  text "R14" at 472.714,24.841 h1.02
  text "R13" at 472.714,22.352 h1.02
  text "R12" at 472.472,19.837 h1.02
  text "R11" at 472.218,17.272 h1.02
  text "R10" at 472.714,14.63 h1.02
  text "R9" at 471.812,12.09 h1.02
  text "R8" at 471.913,9.627 h1.02
  text "R7" at 471.913,7.112 h1.02
  text "R6" at 471.989,4.496 h1.02
  text "R5" at 471.837,1.981 h1.02
  text "R4" at 471.786,-0.559 h1.02
  text "R3" at 471.812,-3.099 h1.02
  text "R2" at 471.837,-5.613 h1.02
  text "R1" at 471.634,-8.128 h1.02
Mechanical 1:
  lines w0.127: 279.261,-19.4 ccw(c279.261,-17.4) 281.261,-17.4 ; 454.159,33.96 cw(c454.608,34.328) 454.239,34.777 ; 454.397,33.725 ccw(c454.847,34.093) 455.215,33.644 ; 469.856,42.316 cw(c469.894,41.77) 470.44,41.808 ; 470.44,39.751 ccw(c470.986,39.789) 471.024,39.243 ; 471.082,155.931 cw(c471.082,153.931) 473.082,153.931 ; 471.151,39.243 ccw(c471.113,39.789) 471.659,39.827
  lines w0.508: -2,2 ccw(c0,2) 0,0 146,0 ccw(c146,2) 148,2 148,148 ccw(c146,148) 146,150 0,150 ccw(c0,148) -2,148 -2,2

## Dimensions
-2.739,-17.4 to 281.261,-17.4 on Keep-Out Layer
-0.967,-19.4 to -0.758,155.6 on Keep-Out Layer

## Text inside footprints (layer, text, board x,y; h text height)
P1: Top Overlay "22" at 99.076,3.968 h1.27 r180; Top Overlay "21" at 99.076,6.508 h1.27 r180; Top Overlay "2" at 128.54,3.968 h1.27 r180; Top Overlay "1" at 128.54,6.508 h1.27 r180
P2: Top Overlay "1" at 134.627,147.015 h1.27 r180; Top Overlay "2" at 134.627,144.475 h1.27 r180; Top Overlay "29" at 95.003,147.015 h1.27 r180; Top Overlay "30" at 95.003,144.475 h1.27 r180
P3: Top Overlay "2" at 22.54,143.968 h1.27 r180; Top Overlay "1" at 22.032,146.508 h1.27 r180; Top Overlay "7" at 10.856,146.508 h1.27 r180; Top Overlay "8" at 10.856,143.968 h1.27 r180